# EAGLE board MacroPad (EAGLE 9.6.2)
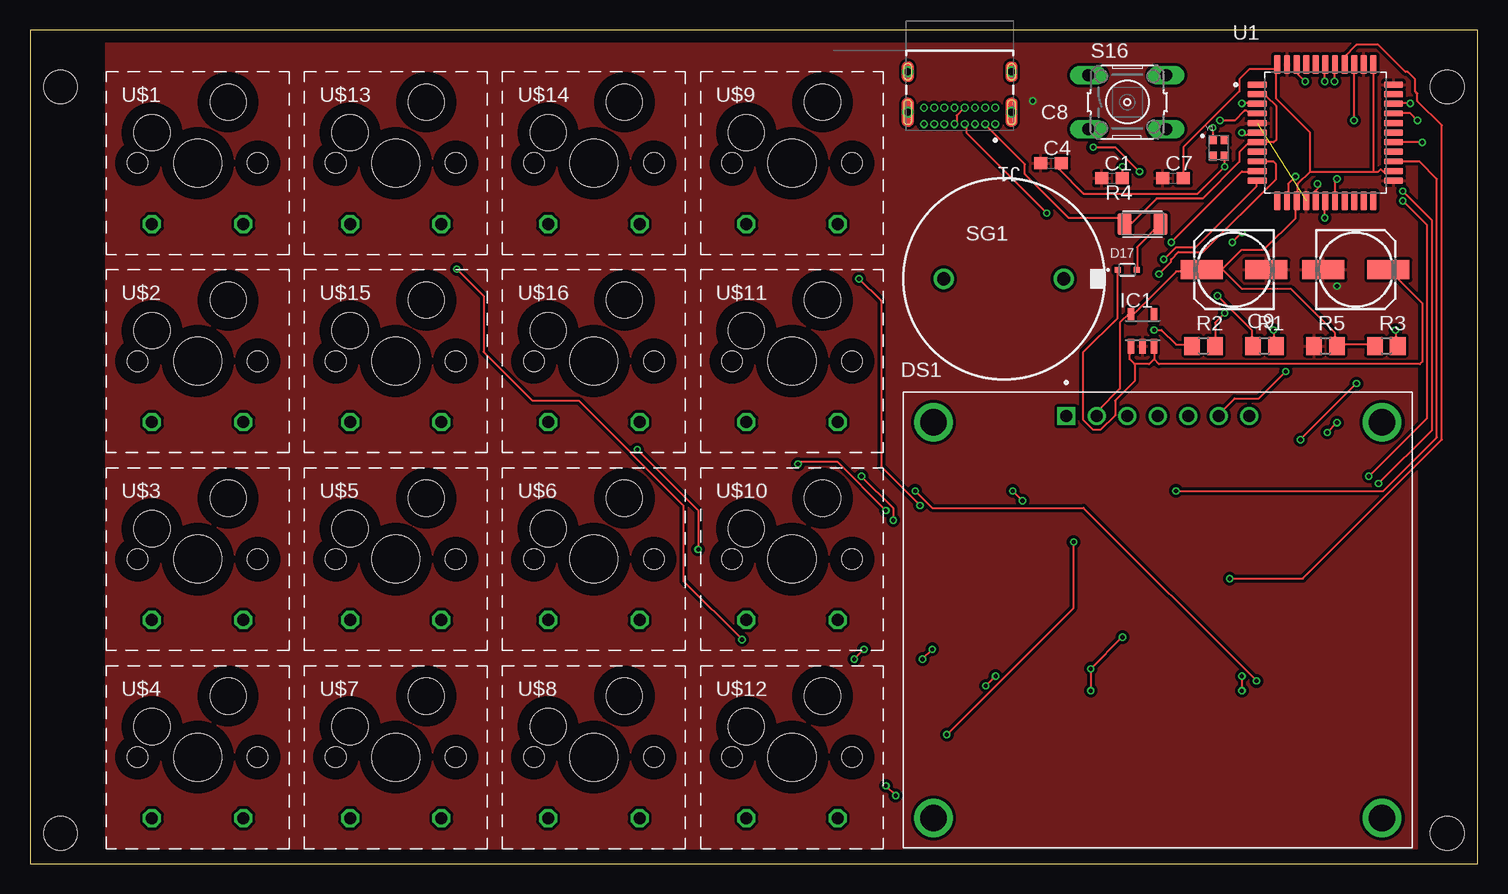
[diagram p0: board, top side]
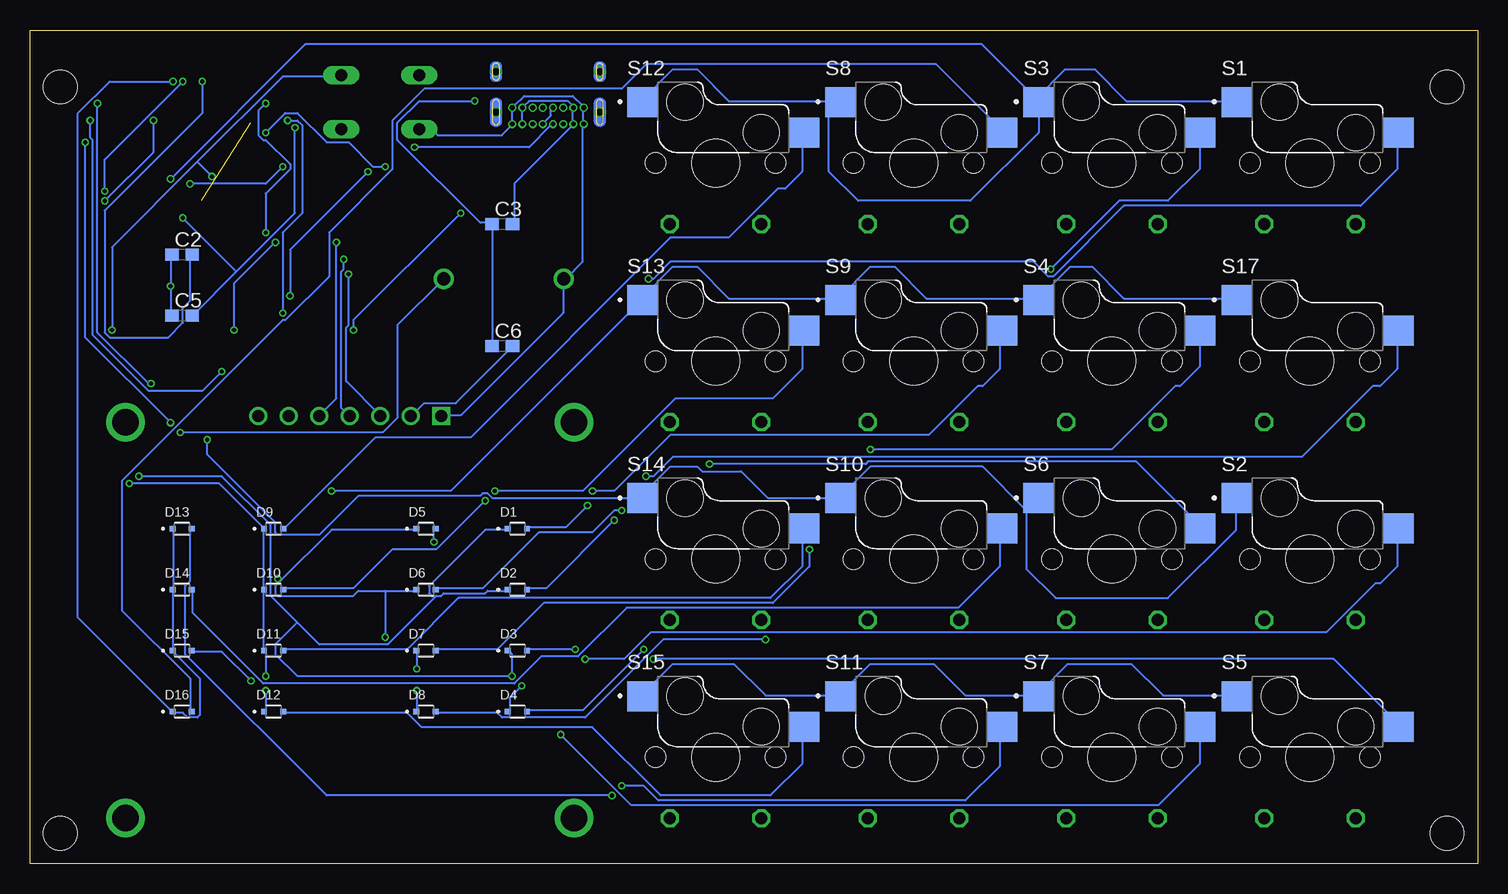
[diagram p1: board, bottom side, seen from below]

Size 120.63 x 69.52 mm. Coordinates in mm from the lower left corner, seen from the top.
Outline: 0,0 120.63,0 120.63,69.52 0,69.52 0,0
Copper layers (1*16): Top 0.035mm / dielectric 1.5mm / Bottom 0.035mm
Design rules "default *": minimum track width 6mil, minimum drill 0.35mm, track to track 10mil, track to pad 6mil, pad to pad 6mil, via to via 6mil, smd to smd 6mil, copper to edge 40mil, drill to drill 6mil, minimum pad ring 5mil, minimum via ring 5mil, stop-mask expansion 4mil, vias tented up to drill 0mil, thermal gap 10mil
Holes 2.8 mm at 2.54,64.77 2.54,2.54 118.11,64.77 118.11,2.54

## Footprints (pad centres in the part's own frame; a part is rotated, then mirrored left to right if it is on the bottom)
C0603 = smd 1.1 x 1: 1 -0.85,0; 2 0.85,0
153CLV-0605 = smd 3.5 x 1.6: + 2.7,0; - -2.7,0
SODFL1608X70N = smd 0.53 x 0.4: A 0.8,0; C -0.8,0
LCD_AOM12864A0-1.54WW-ANO = drill 1 square: 1 -7.62,17 | drill 1: 2 -5.08,17; 3 -2.54,17; 4 0,17; 5 2.54,17; 6 5.08,17; 7 7.62,17 | drill 2.2: P1 -18.7,16.5; P2 18.7,16.5; P3 -18.7,-16.5; P4 18.7,-16.5
SOT23-5 = smd 0.55 x 1.2: 1 -0.95,-1.3; 2 0,-1.3; 3 0.95,-1.3; 4 0.95,1.3; 5 -0.95,1.3
GCT_USB4085-GF-A_REVA4 = drill 0.4 pad 0.65: A1 -2.975,4.36; A4 -2.125,4.36; A5 -1.275,4.36; A6 -0.425,4.36; A7 0.425,4.36; A8 1.275,4.36; A9 2.125,4.36; A12 2.975,4.36; B1 2.975,3.01; B4 2.125,3.01; B5 1.275,3.01; B6 0.425,3.01; B7 -0.425,3.01; B8 -1.275,3.01; B9 -2.125,3.01; B12 -2.975,3.01 | drill 0.6 pad 0.9: S1 -4.325,0; S2 4.325,0; S3 -4.325,3.38; S4 4.325,3.38
R0805 = smd 1.3 x 1.5: 1 -0.95,0; 2 0.95,0
RESC3216X125N = smd 1.2 x 1.82: 1 -1.505,0; 2 1.505,0
SW_PG151101S11 = smd 2.55 x 2.5: 1 -6.725,1.27; 2 6.725,-1.27 | hole 3: 3.175,-1.27; -3.175,1.27
B3F-10XX = drill 1.016 long: 1 -3.251,2.261; 2 3.251,2.261; 3 -3.251,-2.261; 4 3.251,-2.261
EFBAA40D101 = drill 1.1 pad 1.676: 1 -5,0; 2 5,0
QFP80P1200X1200X120-44N = smd 1.6 x 0.55: 1 -5.68,4; 2 -5.68,3.2; 3 -5.68,2.4; 4 -5.68,1.6; 5 -5.68,0.8; 6 -5.68,0; 7 -5.68,-0.8; 8 -5.68,-1.6; 9 -5.68,-2.4; 10 -5.68,-3.2; 11 -5.68,-4; 23 5.68,-4; 24 5.68,-3.2; 25 5.68,-2.4; 26 5.68,-1.6; 27 5.68,-0.8; 28 5.68,0; 29 5.68,0.8; 30 5.68,1.6; 31 5.68,2.4; 32 5.68,3.2; 33 5.68,4 | smd 0.55 x 1.6: 12 -4,-5.68; 13 -3.2,-5.68; 14 -2.4,-5.68; 15 -1.6,-5.68; 16 -0.8,-5.68; 17 0,-5.68; 18 0.8,-5.68; 19 1.6,-5.68; 20 2.4,-5.68; 21 3.2,-5.68; 22 4,-5.68; 34 4,5.68; 35 3.2,5.68; 36 2.4,5.68; 37 1.6,5.68; 38 0.8,5.68; 39 0,5.68; 40 -0.8,5.68; 41 -1.6,5.68; 42 -2.4,5.68; 43 -3.2,5.68; 44 -4,5.68
CHERRY_MX1A-11NN_SWITCH = drill 1 octagon: BR1 -3.81,-5.08; BR2 3.81,-5.08 | drill 1.5 octagon: P$1 2.51,5.08; P$2 -3.81,2.54 | hole 3.988: 0,0 | hole 1.7: 5,0; -5,0
OSC_XRCGB16M000FXN00R0 = smd 0.7 x 0.75: 1 -0.5,0.675; 2 -0.5,-0.675; 3 0.5,-0.675; 4 0.5,0.675

## Placement (x,y rotation side)
C1  1uF  [C0603]  90.17,57.15 0 top
C2  0.1uF  [C0603]  107.95,50.8 0 bottom
C3  1uF  [C0603]  81.28,53.34 0 bottom
C4  12pF  [C0603]  85.09,58.42 0 top
C5  12pF  [C0603]  107.95,45.72 0 bottom
C6  1uF  [C0603]  81.28,43.18 0 bottom
C7  0.1uF  [C0603]  95.25,57.15 0 top
C8  10uF  [153CLV-0605]  110.49,49.53 0 top
C9  10uF  [153CLV-0605]  100.33,49.53 180 top
D1  1N4148WT  [SODFL1608X70N]  80.01,27.94 0 bottom
D2  1N4148WT  [SODFL1608X70N]  80.01,22.86 0 bottom
D3  1N4148WT  [SODFL1608X70N]  80.01,17.78 0 bottom
D4  1N4148WT  [SODFL1608X70N]  80.01,12.7 0 bottom
D5  1N4148WT  [SODFL1608X70N]  87.63,27.94 0 bottom
D6  1N4148WT  [SODFL1608X70N]  87.63,22.86 0 bottom
D7  1N4148WT  [SODFL1608X70N]  87.63,17.78 0 bottom
D8  1N4148WT  [SODFL1608X70N]  87.63,12.7 0 bottom
D9  1N4148WT  [SODFL1608X70N]  100.33,27.94 0 bottom
D10  1N4148WT  [SODFL1608X70N]  100.33,22.86 0 bottom
D11  1N4148WT  [SODFL1608X70N]  100.33,17.78 0 bottom
D12  1N4148WT  [SODFL1608X70N]  100.33,12.7 0 bottom
D13  1N4148WT  [SODFL1608X70N]  107.95,27.94 0 bottom
D14  1N4148WT  [SODFL1608X70N]  107.95,22.86 0 bottom
D15  1N4148WT  [SODFL1608X70N]  107.95,17.78 0 bottom
D16  1N4148WT  [SODFL1608X70N]  107.95,12.7 0 bottom
D17  1N4148WT  [SODFL1608X70N]  91.44,49.53 0 top
DS1  AOM12864A0-1.54WW-ANO  [LCD_AOM12864A0-1.54WW-ANO]  93.98,20.32 0 top
IC1  MIC5219BM5  [SOT23-5]  92.71,44.45 0 top
J1  USB4085-GF-A_REVA4  [GCT_USB4085-GF-A_REVA4]  77.47,66.04 180 top
R1  22  [R0805]  102.87,43.18 0 top
R2  22  [R0805]  97.79,43.18 0 top
R3  10k  [R0805]  113.03,43.18 0 top
R4  0ZCJ0050FF2G  [RESC3216X125N]  92.71,53.34 0 top
R5  10k  [R0805]  107.95,43.18 0 top
S1  PG151101S11  [SW_PG151101S11]  13.34,62.23 0 bottom
S2  PG151101S11  [SW_PG151101S11]  13.34,29.21 0 bottom
S3  PG151101S11  [SW_PG151101S11]  29.84,62.23 0 bottom
S4  PG151101S11  [SW_PG151101S11]  29.84,45.72 0 bottom
S5  PG151101S11  [SW_PG151101S11]  13.34,12.7 0 bottom
S6  PG151101S11  [SW_PG151101S11]  29.84,29.21 0 bottom
S7  PG151101S11  [SW_PG151101S11]  29.84,12.7 0 bottom
S8  PG151101S11  [SW_PG151101S11]  46.35,62.23 0 bottom
S9  PG151101S11  [SW_PG151101S11]  46.35,45.72 0 bottom
S10  PG151101S11  [SW_PG151101S11]  46.35,29.21 0 bottom
S11  PG151101S11  [SW_PG151101S11]  46.35,12.7 0 bottom
S12  PG151101S11  [SW_PG151101S11]  62.87,62.23 0 bottom
S13  PG151101S11  [SW_PG151101S11]  62.87,45.72 0 bottom
S14  PG151101S11  [SW_PG151101S11]  62.87,29.21 0 bottom
S15  PG151101S11  [SW_PG151101S11]  62.87,12.7 0 bottom
S16  [B3F-10XX]  91.44,63.5 0 top
S17  PG151101S11  [SW_PG151101S11]  13.34,45.72 0 bottom
SG1  EFBAA40D101  [EFBAA40D101]  81.15,48.77 0 top
U1  ATMEGA32U4-AUR  [QFP80P1200X1200X120-44N]  107.95,60.96 0 top
U$1  MX1A-11NN  [CHERRY_MX1A-11NN_SWITCH]  13.97,58.42 0 top
U$2  MX1A-11NN  [CHERRY_MX1A-11NN_SWITCH]  13.97,41.91 0 top
U$3  MX1A-11NN  [CHERRY_MX1A-11NN_SWITCH]  13.97,25.4 0 top
U$4  MX1A-11NN  [CHERRY_MX1A-11NN_SWITCH]  13.97,8.89 0 top
U$5  MX1A-11NN  [CHERRY_MX1A-11NN_SWITCH]  30.48,25.4 0 top
U$6  MX1A-11NN  [CHERRY_MX1A-11NN_SWITCH]  46.99,25.4 0 top
U$7  MX1A-11NN  [CHERRY_MX1A-11NN_SWITCH]  30.48,8.89 0 top
U$8  MX1A-11NN  [CHERRY_MX1A-11NN_SWITCH]  46.99,8.89 0 top
U$9  MX1A-11NN  [CHERRY_MX1A-11NN_SWITCH]  63.5,58.42 0 top
U$10  MX1A-11NN  [CHERRY_MX1A-11NN_SWITCH]  63.5,25.4 0 top
U$11  MX1A-11NN  [CHERRY_MX1A-11NN_SWITCH]  63.5,41.91 0 top
U$12  MX1A-11NN  [CHERRY_MX1A-11NN_SWITCH]  63.5,8.89 0 top
U$13  MX1A-11NN  [CHERRY_MX1A-11NN_SWITCH]  30.48,58.42 0 top
U$14  MX1A-11NN  [CHERRY_MX1A-11NN_SWITCH]  46.99,58.42 0 top
U$15  MX1A-11NN  [CHERRY_MX1A-11NN_SWITCH]  30.48,41.91 0 top
U$16  MX1A-11NN  [CHERRY_MX1A-11NN_SWITCH]  46.99,41.91 0 top
Y1  XRCGB16M000FXN00R0  [OSC_XRCGB16M000FXN00R0]  99.06,59.69 0 top

## Library data of the parts
C1-C9 = rcl; SPICEPREFIX: C
D1-D17 = 1N4148WT; AVAILABILITY: In Stock; DESCRIPTION: Diode Standard 75 V 200mA Surface Mount SOD-523F; MF: ON Semiconductor; MP: 1N4148WT; PACKAGE: SOD-523-2 ON Semiconductor; PRICE: None; PURCHASE-URL: https://pricing.snapeda.com/search/part/1N4148WT/?ref=eda
DS1 = AOM12864A0-1.54WW-ANO; AVAILABILITY: In Stock; DESCRIPTION: Non-Touch Graphic LCD Display Module - White OLED SPI 1.54 (39.12mm) 128 x 64; MF: Orient Display; MP: AOM12864A0-1.54WW-ANO; PACKAGE: None; PRICE: None; PURCHASE-URL: https://pricing.snapeda.com/search/part/AOM12864A0-1.54WW-ANO/?ref=eda
IC1 = MIC5219BM5; AVAILABILITY: In Stock; DESCRIPTION: Linear Voltage Regulator IC Positive Adjustable 1 Output 500mA SOT-23-5; MF: Micrel; MP: MIC5219BM5; PACKAGE: SOT-753 Micrel; PRICE: None; PURCHASE-URL: https://pricing.snapeda.com/search/part/MIC5219BM5/?ref=eda
J1 = USB4085-GF-A_REVA4; AVAILABILITY: In Stock; DESCRIPTION: USB-C (USB TYPE-C) USB 2.0 Receptacle Connector 24 (16+8 Dummy) Position Through Hole, Right Angle, low cost, 3.46mm profile, 16 pin, horizontal, Top mount; MF: Global Connector Technology; MP: USB4085-GF-A; PACKAGE: None; PRICE: None; PURCHASE-URL: https://pricing.snapeda.com/search/part/USB4085-GF-A/?ref=eda
R1-R3 R5 = rcl; SPICEPREFIX: R
R4 = 0ZCJ0050FF2G; AVAILABILITY: In Stock; DESCRIPTION: 1206 SMT PPTC | 0.50 Ih | 8V; MF: Bel Fuse; MP: 0ZCJ0050FF2G; PACKAGE: 1206 Bel Fuse; PRICE: None; PURCHASE-URL: https://pricing.snapeda.com/search/part/0ZCJ0050FF2G/?ref=eda
S1-S15 S17 = PG151101S11; AVAILABILITY: Not in stock; MF: Kailh; MP: PG151101S11; PACKAGE: Package; PRICE: None
S16 = switch-omron; MPN: B3F-1000; OC_FARNELL: 176432; OC_NEWARK: 36M3542
SG1 = buzzer; OC_FARNELL: unknown; OC_NEWARK: unknown
U1 = ATMEGA32U4-AUR; AVAILABILITY: In Stock; DESCRIPTION: AVR AVR® ATmega Microcontroller IC 8-Bit 16MHz 32KB (16K x 16) FLASH 44-TQFP (10x10); MF: Microchip Technology; MP: ATMEGA32U4-AUR; PACKAGE: TQFP-44 Microchip; PRICE: None; PURCHASE-URL: https://pricing.snapeda.com/search/part/ATMEGA32U4-AUR/?ref=eda
U$1-U$16 = MX1A-11NN; AVAILABILITY: In Stock; DESCRIPTION: Pushbutton Switch SPST-NO Keyswitch Panel Mount, Front; MF: Cherry; MP: MX1A-11NN; PACKAGE: None; PRICE: None; PURCHASE-URL: https://pricing.snapeda.com/search/part/MX1A-11NN/?ref=eda
Y1 = XRCGB16M000FXN00R0; AVAILABILITY: In Stock; DESCRIPTION: 16 MHz ±40ppm Crystal 6pF 200 Ohms 4-SMD, No Lead; MF: Murata Electronics; MP: XRCGB16M000FXN00R0; PACKAGE: SMD-4 Murata; PRICE: None; PURCHASE-URL: https://pricing.snapeda.com/search/part/XRCGB16M000FXN00R0/?ref=eda

## Nets
A0: D1.C D2.C D3.C D4.C U1.36
A1: D5.C D6.C D7.C D8.C U1.37
A2: D13.C D14.C D15.C D16.C U1.38
A3: D9.C D10.C D11.C D12.C U1.39
D2: U1.19
D3: S1.1 S3.1 S8.1 S12.1 U1.18
D4: S4.1 S9.1 S13.1 S17.1 U1.25
D5: S2.1 S6.1 S10.1 S14.1 U1.31
D6: S5.1 S7.1 S11.1 S15.1
D7: SG1.2 U1.27
D10: DS1.6 U1.30
D14: DS1.4 U1.11
D15: DS1.3 U1.9
D16: DS1.5 U1.10
DGND: DS1.1 J1.A1 J1.A12 J1.B1 J1.B12 S16.3 SG1.1
DN: R1.2 U1.3
DP: R2.2 U1.4
GND: C1.1 C2.1 C3.1 C4.1 C5.1 C6.1 C7.1 C8.- C9.- IC1.2 R5.1 U1.5 U1.15 U1.23 U1.33 U1.35 U1.43
N$1: D1.A S1.2
N$2: D2.A S17.2
N$3: D3.A S2.2
N$4: D4.A S5.2
N$5: D8.A S3.2
N$6: D7.A S4.2
N$7: D6.A S6.2
N$8: D5.A S7.2
N$9: D16.A S8.2
N$10: D15.A S9.2
N$11: D14.A S10.2
N$12: D13.A S11.2
N$13: D9.A S12.2
N$14: D10.A S13.2
N$15: D11.A S14.2
N$16: D12.A S15.2
N$17: D17.A R4.2
N$20: J1.A7 J1.B7 R1.1
N$21: J1.A6 J1.B6 R2.1
N$22: C1.2 U1.6
N$23: C2.2 U1.42
N$24: DS1.7
N$25: C8.+ D17.C IC1.1 IC1.3
RST: R3.2 S16.2 U1.13
UVCC: C3.2 J1.A4 J1.A9 J1.B4 J1.B9 R4.1 U1.2 U1.7
VCC: C6.2 C7.2 C9.+ DS1.2 IC1.5 R3.1 R5.2 U1.14 U1.24 U1.34 U1.44
XTAL1: C5.2 U1.17 Y1.1
XTAL2: C4.2 U1.16 Y1.3

## Tracks (layer width: path | path; a pad name or v marks a point on that pad's centre or on a via)
A0  (via drill 0.35)
  Top 0.152: v80.47,15.65 v79.65,14.83 | v110.34,61.98 110.34,66.45 U1.36 | v114.4,55.27 116.43,53.24 116.43,37.19 v111.56,32.31
  Bottom 0.152: v79.65,14.83 80.67,13.82 80.67,12.8 D4.C | D3.C 80.67,17.68 80.47,17.48 v80.47,15.65 98.35,15.65 100.18,17.48 100.18,18.29 98.35,20.12 | 86.77,22.35 87.17,22.35 87.38,22.55 87.38,23.16 82.7,27.84 80.87,27.84 D1.C | 86.77,22.35 86.36,22.35 86.16,22.55 82.7,22.55 82.5,22.76 80.87,22.76 D2.C | v110.34,61.98 110.34,59.33 v114.4,55.27 | v111.56,32.31 104.65,32.31 100.58,28.25 100.58,22.35 98.35,20.12 | 98.35,20.12 96.52,18.29 90.83,18.29 86.77,22.35
A1  (via drill 0.35)
  Top 0.152: v88.39,14.43 v88.39,16.26 v91.03,18.9 | v99.97,23.77 106.07,23.77 117.65,35.36 117.65,61.57 115.62,63.6 115.62,64.21 115.42,64.41 115.42,65.43 114.81,66.04 114.61,66.04 112.37,68.28 110.54,68.28 109.53,67.26 109.53,66.65 U1.37
  Bottom 0.152: v88.39,14.43 88.39,12.8 D8.C | v88.39,16.26 88.39,17.68 D7.C | 91.03,22.76 93.27,22.76 93.67,22.35 99.97,22.35 100.18,22.55 100.18,23.16 99.77,23.57 | 91.03,22.76 88.59,22.76 D6.C | 99.77,23.57 95.5,27.84 88.59,27.84 D5.C | 99.77,23.57 v99.97,23.77 | 91.03,22.76 v91.03,18.9
A2  (via drill 0.35)
  Top 0.152: v108.71,65.23 108.71,66.45 U1.38
  Bottom 0.152: D13.C 108.71,27.84 108.71,22.96 D14.C 108.71,22.76 108.71,17.88 D15.C 108.71,17.68 106.48,15.44 106.48,12.39 106.68,12.19 107.49,12.19 107.9,12.6 108.71,12.6 D16.C 108.92,12.8 116.64,20.52 116.64,62.59 114,65.23 v108.71,65.23
A3  (via drill 0.35)
  Top 0.152: v100.99,15.65 v100.99,14.43 | v107.9,65.23 107.9,66.45 U1.39 | v114.4,56.08 116.84,53.65 116.84,36.17 v112.37,31.7
  Bottom 0.152: v100.99,14.43 100.99,12.8 D12.C | v100.99,15.65 100.99,17.68 D11.C 101.19,17.88 101.19,22.76 D10.C 101.19,22.96 101.19,27.84 D9.C 101.19,28.04 104.85,31.7 v112.37,31.7 | v107.9,65.23 114.4,58.73 v114.4,56.08
D3  (via drill 0.35)
  Top 0.152: v108.92,57.1 108.71,56.9 108.71,55.47 U1.18
  Bottom 0.152: 54.05,63.6 62.38,63.6 65.02,66.24 67.06,66.24 69.7,63.6 S12.1 | 54.05,63.6 53.24,63.6 S8.1 54.05,63.6 | v108.92,57.1 97.69,68.33 41.3,68.33 36.78,63.8 | 36.78,63.8 36.58,63.6 S3.1 | 36.78,63.8 34.34,66.24 31.9,66.24 29.26,63.6 20.12,63.6 S1.1 | 36.78,63.8 S3.1 | 54.05,63.6 54.05,57.71 51.61,55.27 42.27,55.27 36.58,60.96 36.58,63.4 S3.1
D4  (via drill 0.35)
  Top 0.152: v95.5,31.09 112.78,31.09 117.25,35.56 117.25,57.1 115.82,58.52 113.79,58.52 U1.25
  Bottom 0.152: 36.58,47.14 33.93,49.78 32.11,49.78 29.46,47.14 20.12,47.14 S17.1 | v95.5,31.09 85.55,31.09 69.7,46.94 S13.1 69.7,47.14 67.06,49.78 65.02,49.78 62.38,47.14 53.24,47.14 | 36.58,47.14 45.92,47.14 48.56,49.78 50.6,49.78 53.24,47.14 | 36.58,47.14 S4.1 | 53.24,47.14 S9.1
D5  (via drill 0.35)
  Top 0.152: v115.01,63.4 113.79,63.4 U1.31 | v105.87,35.36 v110.54,40.03
  Bottom 0.152: 37.59,29.46 37.59,24.59 35.15,22.15 25.81,22.15 20.12,27.84 20.12,30.48 S2.1 | 37.59,29.46 S6.1 37.59,29.46 | 37.59,29.46 41.25,33.12 50.6,33.12 52.02,31.7 52.02,31.5 53.03,30.48 S10.1 59.13,30.48 61.37,32.72 64.62,32.72 65.02,33.12 67.26,33.12 69.9,30.48 | v115.01,63.4 115.01,44.3 110.74,40.03 v110.54,40.03 | v105.87,35.36 105.87,34.14 100.18,28.45 100.18,27.64 99.97,27.43 96.52,27.43 93.27,30.68 83.11,30.68 82.91,30.89 82.5,30.89 82.09,30.48 69.9,30.48 | 69.9,30.48 S14.1
D6
  Bottom 0.152: S5.1 20.12,14.02 26.21,14.02 28.85,16.66 34.14,16.66 36.37,14.43 36.37,14.02 S7.1 36.58,14.02 42.67,14.02 45.31,16.66 50.6,16.66 53.24,14.02 | 53.24,14.02 59.33,14.02 61.98,16.66 67.06,16.66 69.7,14.02 S15.1 | 53.24,14.02 S11.1
D7  (via drill 0.35)
  Top 0.152: v116.03,60.15 113.79,60.15 U1.27 | v108.1,35.97 v108.92,36.78
  Bottom 0.152: v116.03,60.15 116.03,43.89 v108.92,36.78 | v108.1,35.97 91.24,35.97 90.02,37.19 90.02,44.91 SG1.2
D10  (via drill 0.35)
  Top 0.152: v115.62,61.98 115.01,62.59 113.79,62.59 U1.30 | v104.65,41.05 102.41,38.81 100.38,38.81 98.96,37.39 DS1.6
  Bottom 0.152: v115.62,61.98 115.62,60.55 115.42,60.35 115.42,44.09 110.74,39.42 106.27,39.42 v104.65,41.05
D14  (via drill 0.35)
  Top 0.152: v94.49,50.39 95.5,51.41 97.13,51.41 102.21,56.49 102.21,56.9 U1.11
  Bottom 0.152: v94.49,50.39 94.49,49.58 94.69,49.38 94.69,38 94.08,37.39 DS1.4
D15  (via drill 0.35)
  Top 0.152: v94.08,49.17 95.1,50.19 95.1,50.39 95.71,51 97.74,51 103.83,57.1 103.83,58.32 103.63,58.52 102.41,58.52 U1.9
  Bottom 0.152: v94.08,49.17 94.08,44.91 94.28,44.7 94.28,40.23 91.44,37.39 DS1.3
D16  (via drill 0.35)
  Top 0.152: v95.1,51.82 100.99,57.71 102.21,57.71 U1.10
  Bottom 0.152: v95.1,51.82 95.1,38.81 96.52,37.39 DS1.5
DGND
  Bottom 0.152: S16.3 87.17,61.24 86.67,60.73 81.31,60.73 80.47,61.57 J1.A1 80.47,61.77 80.47,62.99 J1.B12 80.26,63.2 79.45,64.01 75.39,64.01 74.57,63.2 J1.B1 74.57,62.99 74.57,61.77 J1.A12 74.57,61.57 74.57,50.19 76,48.77 SG1.1 76.2,48.77 76.2,45.92 84.73,37.39 86.36,37.39 DS1.1
DN  (via drill 0.35)
  Top 0.152: v103.63,44.5 103.63,43.28 R1.2 | v100.99,52.63 v100.18,51.82 | v100.99,63.4 102.21,63.4 U1.3
  Bottom 0.152: v103.63,44.5 103.63,48.36 v100.18,51.82 | v100.99,52.63 100.99,55.88 98.96,57.91 98.96,58.32 100.99,60.35 101.19,60.35 101.6,60.76 101.6,62.79 v100.99,63.4
DP  (via drill 0.35)
  Top 0.152: v99.57,45.92 98.75,45.11 98.75,43.28 R2.2 | v99.16,61.98 100.38,61.98 101.19,62.79 101.4,62.79 101.6,62.59 102.21,62.59 U1.4
  Bottom 0.152: v99.57,45.92 99.57,52.63 97.94,54.25 97.94,61.57 98.35,61.98 v99.16,61.98
GND  (via drill 0.35)  (1 unrouted)
  Bottom 0.152: C5.1 108.92,45.72 v108.92,48.16 108.92,50.8 C2.1 | C6.1 82.09,43.28 82.09,53.24 C3.1 82.3,53.44 83.11,53.44 90.02,60.35 90.02,61.77 88.19,63.6 v83.57,63.6
  pour Top: 115.57,68.58 115.57,1.27 6.35,1.27 6.35,68.58
N$1  (via drill 0.35)
  Top 0.152: v74.17,29.87 70.92,33.12 70.92,46.94 v69.09,48.77
  Bottom 0.152: v74.17,29.87 76,28.04 79.05,28.04 D1.A | v69.09,48.77 68.68,48.77 67.26,50.19 36.98,50.19 35.76,48.97 35.36,48.97 29.46,54.86 9.75,54.86 6.71,57.91 6.71,60.96 S1.2
N$2  (via drill 0.35)
  Top 0.152: v71.93,28.65 71.93,29.67 v69.29,32.31
  Bottom 0.152: v71.93,28.65 77.62,22.96 79.05,22.96 D2.A | v69.29,32.31 68.68,32.31 67.06,33.93 14.63,33.93 8.74,39.83 8.13,39.83 6.71,41.25 6.71,44.3 S17.2
N$3  (via drill 0.35)
  Top 0.152: v74.37,17.07 v75.18,17.88
  Bottom 0.152: v75.18,17.88 79.05,17.88 D3.A | v74.37,17.07 71.12,17.07 68.89,19.3 12.6,19.3 8.53,23.37 8.13,23.37 6.71,24.79 6.71,27.84 S2.2
N$4  (via drill 0.35)
  Top 0.152: v68.68,17.07 v69.49,17.88
  Bottom 0.152: v69.49,17.88 74.57,12.8 79.05,12.8 D4.A | v68.68,17.07 11.99,17.07 6.5,11.58 S5.2
N$5  (via drill 0.35)
  Top 0.152: v59.33,18.69 54.46,23.57 54.46,29.87 45.72,38.61 41.86,38.61 37.8,42.67 37.8,47.35 v35.56,49.58
  Bottom 0.152: v59.33,18.69 67.87,18.69 74.37,12.19 81.28,12.19 81.69,12.6 86.77,12.6 D8.A | v35.56,49.58 29.87,55.27 25.81,55.27 23.16,57.91 23.16,60.96 S3.2
N$6  (via drill 0.35)
  Top 0.152: v55.68,26.21 55.68,29.46 v50.6,34.54
  Bottom 0.152: v55.68,26.21 55.68,24.79 58.73,21.74 77.83,21.74 81.69,17.88 86.77,17.88 D7.A | v50.6,34.54 30.48,34.54 25.2,39.83 24.79,39.83 23.16,41.45 23.16,44.3 S4.2
N$7  (via drill 0.35)
  Top 0.152: v71.32,29.46 67.26,33.53 64.21,33.53 v64.01,33.33
  Bottom 0.152: v71.32,29.46 71.93,29.46 73.76,27.64 78.23,27.64 82.91,22.96 86.77,22.96 D6.A | v64.01,33.33 51,33.33 50.8,33.53 28.45,33.53 22.96,28.04 S6.2
N$8  (via drill 0.35)
  Top 0.152: v86.97,26.82 86.97,21.34 v76.4,10.77
  Bottom 0.152: v86.97,26.82 86.97,27.84 D5.A | v76.4,10.77 70.51,4.88 26.62,4.88 23.16,8.33 23.16,11.38 S7.2
N$9
  Bottom 0.152: D16.A 107.29,12.8 107.29,15.44 112.98,21.13 112.98,31.9 99.57,45.31 99.36,45.31 95.71,48.97 95.71,52.63 90.42,57.91 90.42,61.98 87.78,64.62 71.32,64.62 69.29,66.65 45.11,66.65 39.83,61.37 39.83,60.96 S8.2
N$10  (via drill 0.35)
  Top 0.152: v102.21,15.24 87.78,29.67 75.18,29.67 v73.76,31.09
  Bottom 0.152: v102.21,15.24 104.65,17.68 107.09,17.68 D15.A | v73.76,31.09 71.93,31.09 67.26,35.76 45.72,35.76 41.66,39.83 41.25,39.83 39.83,41.25 39.83,44.3 S9.2
N$11
  Bottom 0.152: D14.A 107.09,22.76 107.09,20.93 101.19,15.04 80.26,15.04 78.03,17.27 74.98,17.27 70.92,21.34 43.28,21.34 39.83,24.79 39.83,27.84 S10.2
N$12  (via drill 0.35)
  Top 0.152: v71.32,6.5 v72.14,5.69
  Bottom 0.152: v72.14,5.69 95.91,5.69 107.7,17.48 107.7,23.16 107.29,23.57 107.29,27.84 D13.A | v71.32,6.5 69.49,6.5 68.28,5.28 42.67,5.28 39.83,8.13 39.83,11.38 S11.2
N$13
  Bottom 0.152: D9.A 99.36,28.04 91.85,35.56 83.92,35.56 67.26,52.22 62.38,52.22 58.32,56.29 57.71,56.29 56.29,57.71 56.29,60.96 S12.2
N$14  (via drill 0.35)
  Top 0.152: v81.89,31.09 v82.7,30.28
  Bottom 0.152: v82.7,30.28 86.77,26.21 90.42,26.21 93.67,22.96 99.36,22.96 D10.A | v81.89,31.09 74.57,31.09 66.85,38.81 58.73,38.81 56.29,41.25 56.29,44.3 S13.2
N$15
  Bottom 0.152: D11.A 99.36,17.88 89.2,17.88 84.94,22.15 58.93,22.15 56.29,24.79 56.29,27.84 S14.2
N$16
  Bottom 0.152: D12.A 99.36,12.6 89.2,12.6 87.99,11.38 73.76,11.38 68.07,5.69 58.93,5.69 56.29,8.33 56.29,11.38 S15.2
N$17
  Top 0.152: D17.A 92.25,49.58 92.25,51.41 94.08,53.24 R4.2
N$20  (via drill 0.35)
  Top 0.152: J1.A7 77.22,61.77 77.22,62.38 77.83,62.99 J1.B7 | v98.96,47.35 101.8,44.5 101.8,43.28 R1.1 | v92.46,57.71 90.42,59.74 v88.59,59.74
  Bottom 0.152: v98.96,47.35 98.96,51.21 v92.46,57.71 | v88.59,59.74 79.05,59.74 77.22,61.57 J1.A7
N$21  (via drill 0.35)
  Top 0.152: v93.67,44.5 94.28,44.5 95.5,43.28 96.72,43.28 R2.1 | v84.73,54.25 78.03,60.96 78.03,61.57 J1.A6
  Bottom 0.152: J1.B6 77.22,62.99 77.22,62.38 77.83,61.77 J1.A6 | v93.67,44.5 93.67,45.31 v84.73,54.25
N$22  (via drill 0.35)
  Top 0.152: v91.03,58.12 91.03,57.3 C1.2 | v100.99,60.96 101.19,60.76 101.4,60.76 101.6,60.96 U1.6
  Bottom 0.152: v91.03,58.12 92.05,58.12 94.08,60.15 95.91,60.15 98.35,62.59 99.36,62.59 v100.99,60.96
N$23  (via drill 0.35)
  Top 0.152: v106.27,65.23 105.66,65.84 105.66,66.45 U1.42
  Bottom 0.152: v106.27,65.23 106.27,62.59 114.4,54.46 114.4,44.3 114,43.89 109.12,43.89 107.9,45.11 107.9,46.33 107.29,46.94 107.29,50.8 C2.2
N$25
  Top 0.152: 92.05,41.66 91.64,42.06 91.64,42.47 91.85,42.67 91.85,43.08 IC1.1 | 92.05,41.66 93.27,41.66 93.67,42.06 | 93.67,42.06 93.67,43.08 IC1.3 | 93.67,42.06 94.08,41.66 115.82,41.66 116.03,41.86 116.03,46.74 113.39,49.38 C8.+ | 92.05,41.66 92.05,40.23 90.42,38.61 90.42,37.39 89.2,36.17 88.59,36.17 87.78,36.98 87.78,42.67 90.63,45.52 90.63,49.38 D17.C
RST  (via drill 0.35)
  Top 0.152: v113.79,44.5 113.79,43.28 R3.2 | v105.46,57.3 104.85,56.69 104.85,55.47 U1.13
  Bottom 0.152: v113.79,44.5 113.79,51.41 106.68,58.52 | 106.68,58.52 99.57,65.63 94.69,65.63 S16.2 | 106.68,58.52 v105.46,57.3
UVCC
  Top 0.152: U1.2 102.41,64.01 103.02,64.01 103.83,63.2 103.83,60.35 103.63,60.15 102.41,60.15 U1.7 102.21,60.15 101.6,60.15 100.79,59.33 100.79,58.52 97.74,55.47 93.88,55.47 91.85,53.44 91.24,53.44 R4.1 91.03,53.44 90.63,53.85 86.56,53.85 82.91,57.51 82.91,58.32 79.65,61.57 J1.A4
  Bottom 0.152: J1.A4 79.65,61.77 79.65,62.99 J1.B9 79.45,63.2 79.05,63.6 75.79,63.6 75.39,63.2 J1.B4 75.39,62.99 75.39,61.77 J1.A9 75.39,61.57 80.26,56.69 80.26,53.44 C3.2
VCC
  Top 0.152: 103.83,66.24 104.04,66.24 104.04,66.45 U1.44 103.83,66.24 | 103.83,66.24 101.6,66.24 100.79,65.43 100.79,64.41 96.11,59.74 96.11,57.3 C7.2 | R3.1 111.96,43.28 108.92,43.28 R5.2 108.71,43.28 108.71,44.3 105.05,47.95 100.99,47.95 99.36,49.58 | C9.+ 97.54,49.38 95.5,49.38 92.05,45.92 91.85,45.92 IC1.5 91.64,45.92 90.83,45.11 90.83,39.62 89,37.8 89,37.39 DS1.2 | 99.36,49.58 100.99,51.21 102.82,51.21 105.46,53.85 105.46,55.27 U1.14 105.66,55.47 105.66,56.69 106.68,57.71 | 99.36,49.58 97.74,49.58 C9.+ | 106.68,57.71 111.96,57.71 | 111.96,57.71 112.37,57.71 112.57,57.91 112.78,57.71 113.59,57.71 U1.24 | 111.96,57.71 111.96,66.45 U1.34 | 99.36,49.58 C9.+ | 103.83,66.24 103.83,63.8 106.68,60.96 106.68,57.71
  Bottom 0.152: C6.2 80.47,43.08 85.14,38.41 87.78,38.41 88.8,37.39 DS1.2
XTAL1  (via drill 0.35)
  Top 0.152: v98.55,61.37 98.55,60.55 Y1.1 | v107.9,53.85 107.9,55.27 U1.17
  Bottom 0.152: v98.55,61.37 98.55,54.25 103.43,49.38 | 103.43,49.38 107.09,45.72 C5.2 | 103.43,49.38 v107.9,53.85
XTAL2  (via drill 0.35)
  Top 0.152: Y1.3 99.57,58.93 v99.57,58.12 97.33,55.88 87.78,55.88 85.75,57.91 85.75,58.32 C4.2 | v107.29,56.69 107.49,56.49 107.09,56.08 107.09,55.47 U1.16
  Bottom 0.152: v107.29,56.69 100.99,56.69 v99.57,58.12

## Text on the board
Holes: If you're reading this: have a nice day! | Dyl's Macropad